# EAGLE board touch_brick (EAGLE 7.2.0)
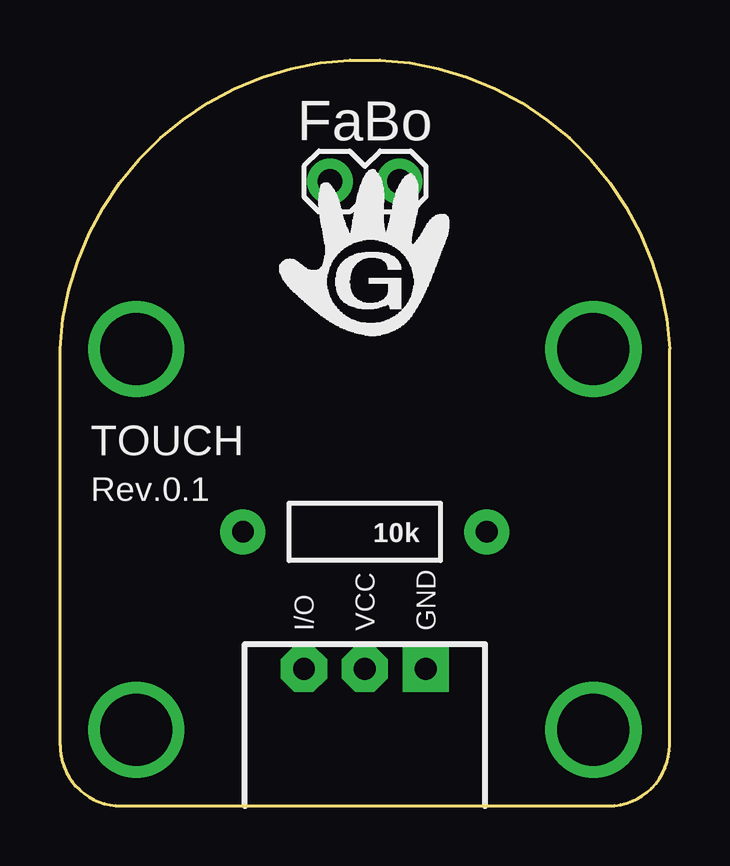
[diagram p0: board, top side]
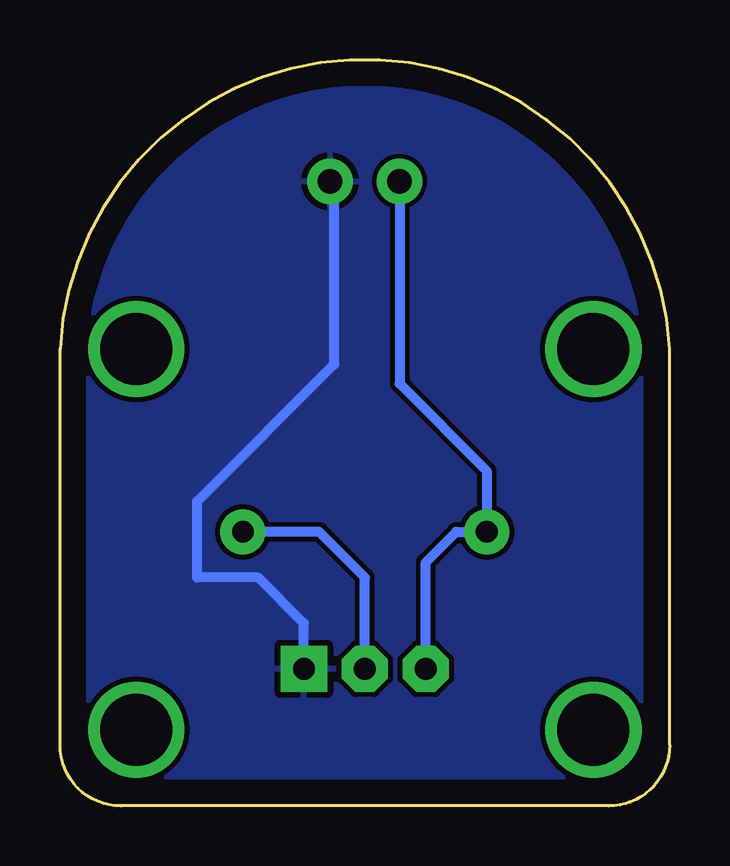
[diagram p1: board, bottom side, seen from below]

Size 25.4 x 31.1 mm. Coordinates in mm from the lower left corner, seen from the top.
Copper layers (1*16): Top 0.035mm / dielectric 1.5mm / Bottom 0.035mm
Design rules "default": minimum track width 10mil, minimum drill 24mil, track to track 8mil, track to pad 8mil, pad to pad 8mil, via to via 8mil, smd to smd 8mil, copper to edge 40mil, drill to drill 8mil, minimum pad ring 10mil, minimum via ring 8mil, stop-mask expansion 4mil, vias tented up to drill 0mil, thermal gap 10mil

## Footprints (pad centres in the part's own frame; a part is rotated, then mirrored left to right if it is on the bottom)
BRICK_3PIN = drill 0.9 pad 1.93 square: GND 2.54,-9.525 | drill 0.9 pad 1.93 octagon: IN/OUT -2.54,-9.525; VCC 0,-9.525 | drill 3 pad 3.81: P$1 -9.525,3.81; P$2 9.525,3.81; P$3 9.525,-12.065; P$4 -9.525,-12.065
AXIAL-0.4 = drill 0.9 pad 1.88: P$1 -5.08,0; P$2 5.08,0
1X02_LOCK = drill 1.016 pad 1.88: 1 -0.178,0; 2 2.718,0

## Placement (x,y rotation side)
J1  BRICK_3PIN  [BRICK_3PIN]  12.7,15.24 0 top
R1  10k  [AXIAL-0.4]  12.7,11.43 180 top
U1  [1X02_LOCK]  11.43,26.04 0 top

## Library data of the parts
J1 = Gclue
R1 = SparkFun-Resistors
U1 = SparkFun

## Nets
GND: J1.GND U1.2
N$1: J1.IN/OUT R1.P$2 U1.1
N$2: J1.VCC R1.P$1

## Tracks (layer width: path | path; a pad name or v marks a point on that pad's centre or on a via)
GND
  Bottom 0.406: J1.GND 15.24,7.62 17.14,9.53 19.68,9.53 19.68,12.7 13.97,18.41 13.97,25.86 U1.2
  pour Bottom: -0.64,-0.63 26.04,-0.63 26.04,31.75 -0.64,31.75
N$1
  Bottom 0.406: U1.1 11.25,17.6 7.62,13.97 R1.P$2 8.89,11.43 10.16,10.16 J1.IN/OUT
N$2
  Bottom 0.406: J1.VCC 12.7,9.53 14.6,11.43 R1.P$1

## Text on the board
tPlace: TOUCH | Rev.0.1